# EAGLE board untitled (EAGLE 6.4)
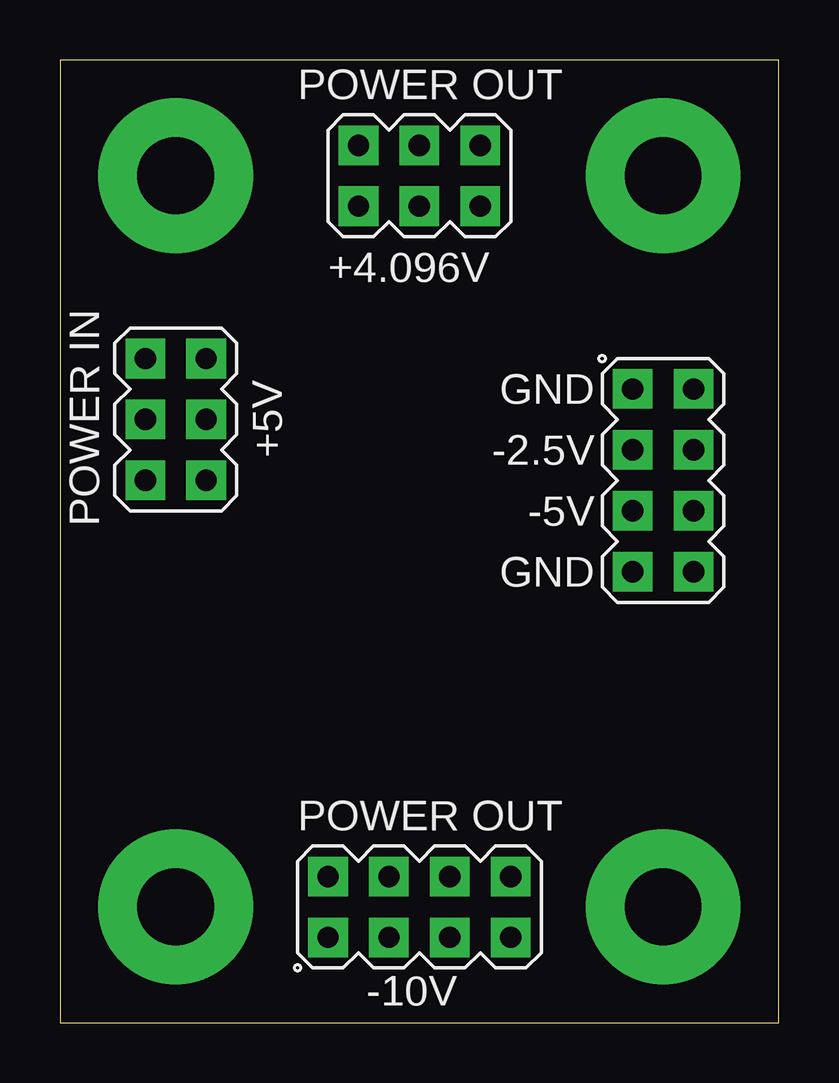
[diagram p0: board, top side]
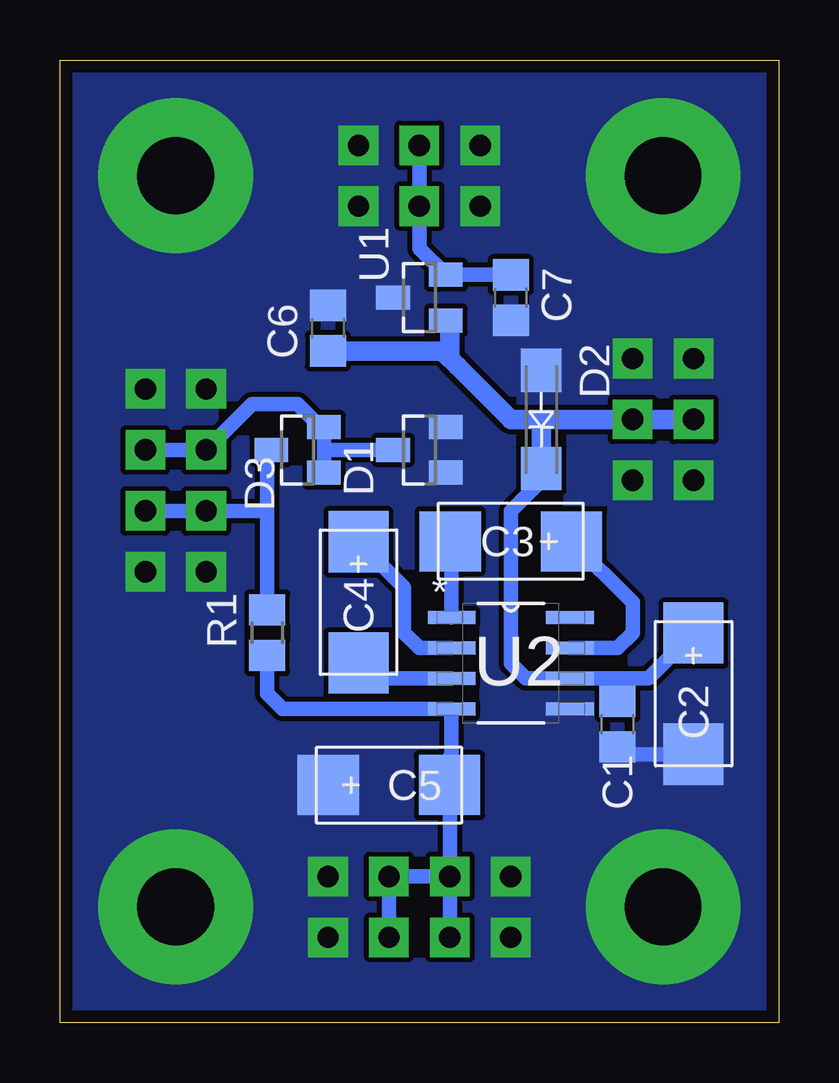
[diagram p1: board, bottom side, seen from below]

Size 29.97 x 40.13 mm. Coordinates in mm from the lower left corner, seen from the top.
Outline: 0,0 29.97,0 29.97,40.13 0,40.13 0,0
Copper layers (1*16): Top 0.035mm / dielectric 1.5mm / Bottom 0.035mm
Design rules "jacho35": minimum track width 8mil, minimum drill 16mil, track to track 8mil, track to pad 8mil, pad to pad 8mil, via to via 8mil, smd to smd 8mil, copper to edge 20mil, drill to drill 8mil, minimum pad ring 10mil, minimum via ring 8mil, stop-mask expansion 4mil, vias tented up to drill 25mil, thermal gap 0mil

## Footprints (pad centres in the part's own frame; a part is rotated, then mirrored left to right if it is on the bottom)
C0805 = smd 1.3 x 1.5: 1 -0.95,0; 2 0.95,0
C = smd 2.55 x 2.5: + 2.525,0; - -2.525,0
SOT23 = smd 1 x 1.4: 1 -0.95,-1.1; 2 0.95,-1.1; 3 0,1.1
SMA = smd 1.8 x 1.7: A -2.05,0; K 2.05,0
0805 = smd 1.3 x 1.5: 1 -0.95,0; 2 0.95,0
MA03-2 = drill 0.889 pad 1.651 square: 1 -2.54,-1.27; 2 -2.54,1.27; 3 0,-1.27; 4 0,1.27; 5 2.54,-1.27; 6 2.54,1.27
MA04-2 = drill 0.889 pad 1.651 square: 1 -3.81,-1.27; 2 -3.81,1.27; 3 -1.27,-1.27; 4 -1.27,1.27; 5 1.27,-1.27; 6 1.27,1.27; 7 3.81,-1.27; 8 3.81,1.27
SO8 = smd 1.981 x 0.559: 1 -2.464,1.905; 2 -2.464,0.635; 3 -2.464,-0.635; 4 -2.464,-1.905; 5 2.464,-1.905; 6 2.464,-0.635; 7 2.464,0.635; 8 2.464,1.905
SROUB3M = drill 3.2 pad 6.452: P$1 0,0

## Placement (x,y rotation side)
C1  100nF  [C0805]  6.73,12.45 270 bottom
C2  47uF  [C]  3.56,13.72 90 bottom
C3  [C]  11.18,20.07 0 bottom
C4  [C]  17.53,17.53 90 bottom
C5  [C]  16.26,9.91 180 bottom
C6  100nF  [C0805]  18.8,28.96 90 bottom
C7  1uF  [C0805]  11.18,30.23 270 bottom
D1  TS2431A  [SOT23]  14.99,23.88 90 bottom
D2  M4  [SMA]  9.91,25.15 270 bottom
D3  TS2431A  [SOT23]  20.07,23.88 90 bottom
R1  [0805]  21.34,16.26 90 bottom
SV1  [MA03-2]  4.83,25.15 90 top
SV2  [MA04-2]  14.99,4.83 0 top
SV3  [MA04-2]  25.15,22.61 270 top
SV5  [MA03-2]  14.99,35.31 0 top
U1  MCP1541T  [SOT23]  14.99,30.23 90 bottom
U2  TC682E  [SO8]  11.18,14.99 0 bottom
X1  SROUB3M  [SROUB3M]  4.83,4.83 0 top
X2  SROUB3M  [SROUB3M]  25.15,35.31 0 top
X3  SROUB3M  [SROUB3M]  25.15,4.83 0 top
X4  SROUB3M  [SROUB3M]  4.83,35.31 0 top

## Library data of the parts
C1-C7 = moje_C
D1 D3 U1 = moje_diody
D2 X1-X4 = moje
R1 = moje_R
SV1-SV3 SV5 = moje_hrebinky; OC_FARNELL: unknown; OC_NEWARK: unknown
U2 = moje_io

## Nets
+5V: C1.1 C2.+ C6.1 D2.K SV1.3 SV1.4 U1.1 U2.6
-VCC: C5.- R1.1 SV2.3 SV2.4 SV2.5 SV2.6 U2.4
GND: C1.2 C2.- C5.+ C6.2 C7.2 D1.1 D1.2 D2.A SV1.1 SV1.2 SV1.5 SV1.6 SV2.1 SV2.2 SV2.7 SV2.8 SV3.1 SV3.2 SV3.7 SV3.8 SV5.1 SV5.2 SV5.5 SV5.6 U1.3 U2.5 X1.P$1 X2.P$1 X3.P$1 X4.P$1
N$1: C3.- U2.1
N$2: C3.+ U2.7
N$3: C4.+ U2.2
N$4: C4.- U2.3
N$5: D3.3 R1.2 SV3.5 SV3.6
N$6: D1.3 D3.1 D3.2 SV3.3 SV3.4
N$10: C7.1 SV5.3 SV5.4 U1.2

## Tracks (layer width: path | path; a pad name or v marks a point on that pad's centre or on a via)
+5V
  Bottom 0.406: C1.1 7.37,14.35 U2.6
  Bottom 0.61: 7.37,14.35 7.05,14.35 7.37,14.35 | 7.37,14.35 5.45,14.35 C2.+ | D2.K 9.91,22.61 11.18,21.34 11.18,14.99 10.54,14.35 U2.6 7.37,14.35 | 13.72,29.11 U1.1
  Bottom 0.813: SV1.4 SV1.3 7.86,25.15 9.91,25.15 | 9.91,25.15 11.18,25.15 13.4,27.37 | 13.4,27.37 13.72,27.69 | C6.1 14.04,28.01 13.72,27.69 | 13.72,29.11 13.72,27.69 | 13.72,27.69 13.4,27.37 | D2.K 9.91,25.15
-VCC
  Bottom 0.406: 13.64,10 13.73,10 C5.-
  Bottom 0.61: 13.64,11.18 U2.4 20.7,13.08 21.34,13.72 R1.1 | 13.64,11.18 13.64,10 | SV2.3 SV2.4 | SV2.5 SV2.6 SV2.4 | SV2.4 13.72,11.1 13.64,11.18
GND
  Bottom 0.61: C2.- 7.06,11.19 C1.2
  pour Bottom: -1.52,39.12 -1.52,-2.79 30.23,-2.79 30.23,40.39 -1.52,40.39
N$1
  Bottom 0.61: U2.1 13.64,20 C3.-
N$2
  Bottom 0.61: U2.7 6.73,15.62 6.1,16.26 6.1,17.51 C3.+
N$3
  Bottom 0.61: U2.2 14.99,15.62 15.62,16.26 15.62,18.15 C4.+
N$4
  Bottom 0.61: U2.3 16.88,14.35 C4.-
N$5
  Bottom 0.61: SV3.6 SV3.5 21.34,21.34 | R1.2 21.34,21.34 | 21.34,21.34 21.34,23.71 D3.3
N$6
  Bottom 0.61: D3.1 18.97,23.88 | 18.97,23.88 D3.2 19.11,24.83 20.07,25.78 21.97,25.78 SV3.3 SV3.4 | D1.3 18.97,23.88
N$10
  Bottom 0.61: C7.1 U1.2 14.99,32.28 SV5.3 SV5.4

## Text on the board
tPlace: POWER OUT | +4.096V | GND | -2.5V | +5V | -5V | POWER IN | GND | POWER OUT | -10V